# Altium PCB EG8010.PcbDoc
Units mm, origin at the board's own origin, x right, y up, seen from the top; angles counter-clockwise.
Board outline 42.42 x 41.66 mm, 2 copper layers (Top Layer, Bottom Layer); 37 components, 28 nets, 133 pads, 43 vias.
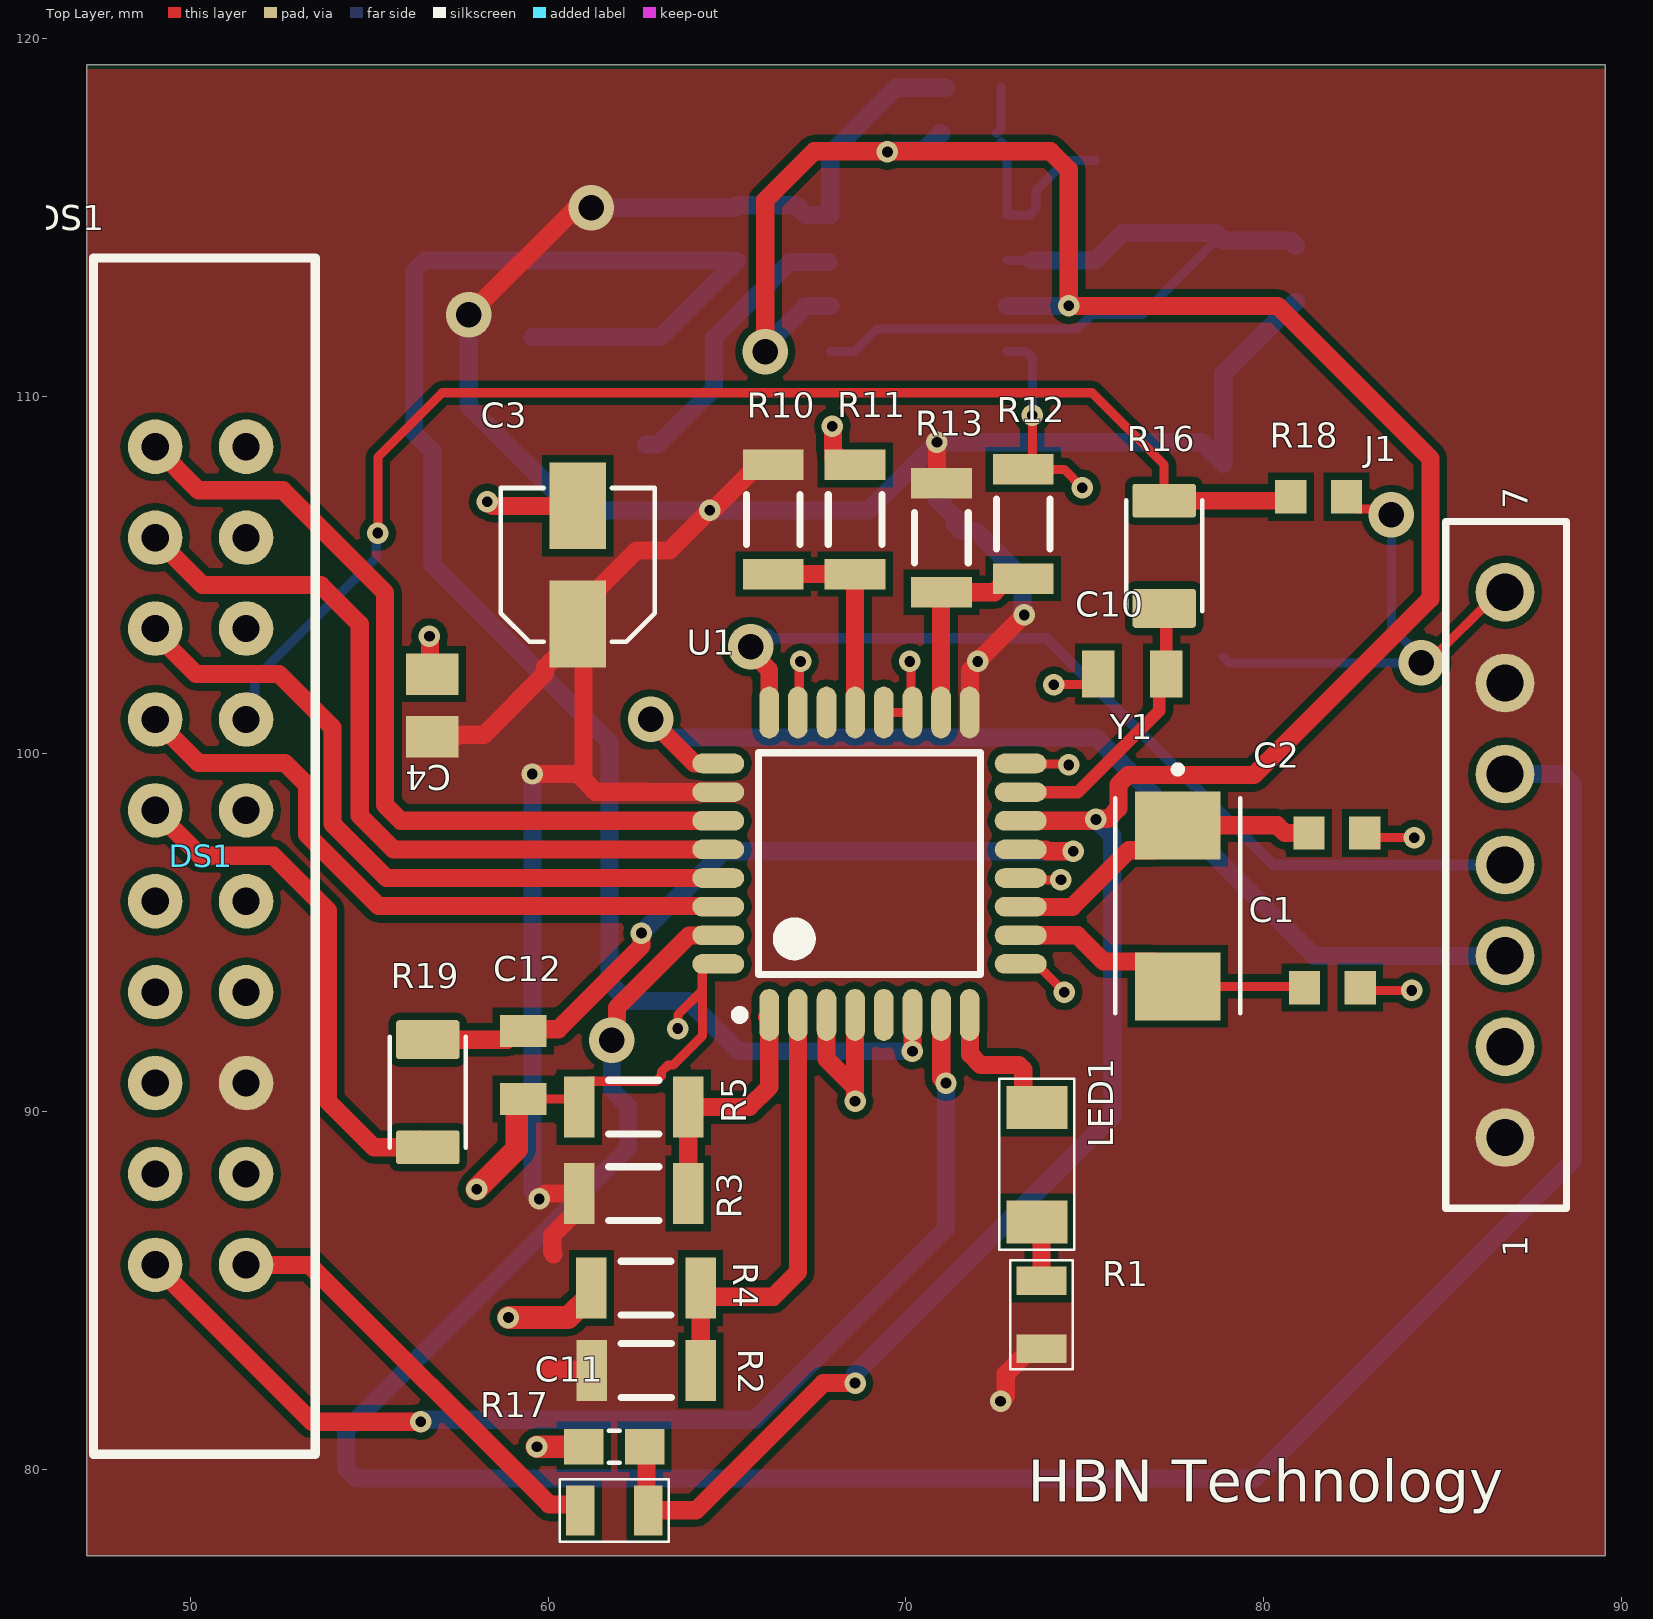
[diagram p0: Top Layer view]
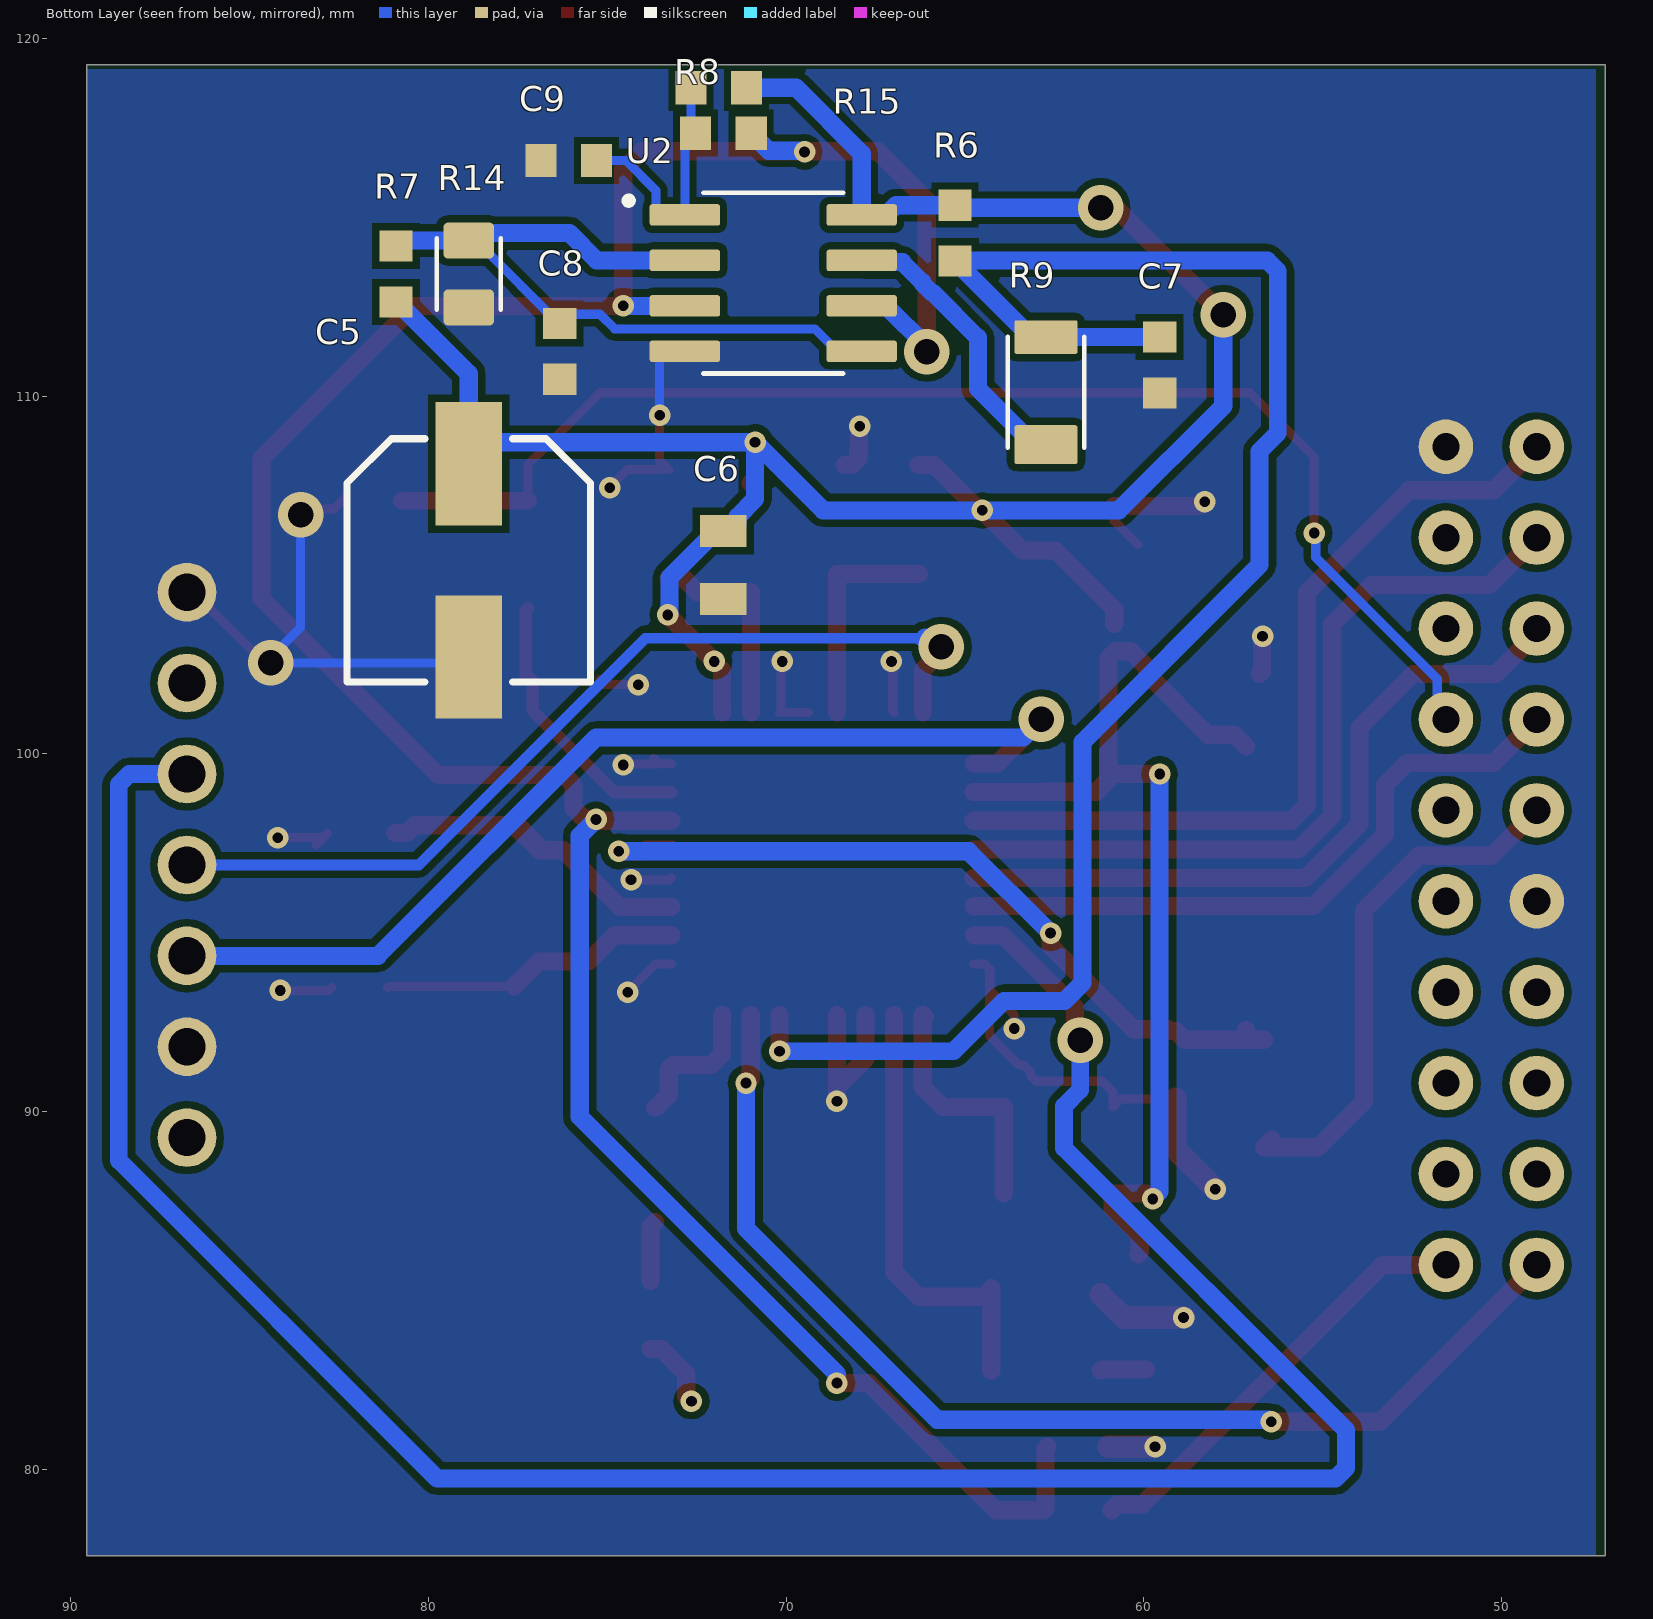
[diagram p1: Bottom Layer view, seen from below]
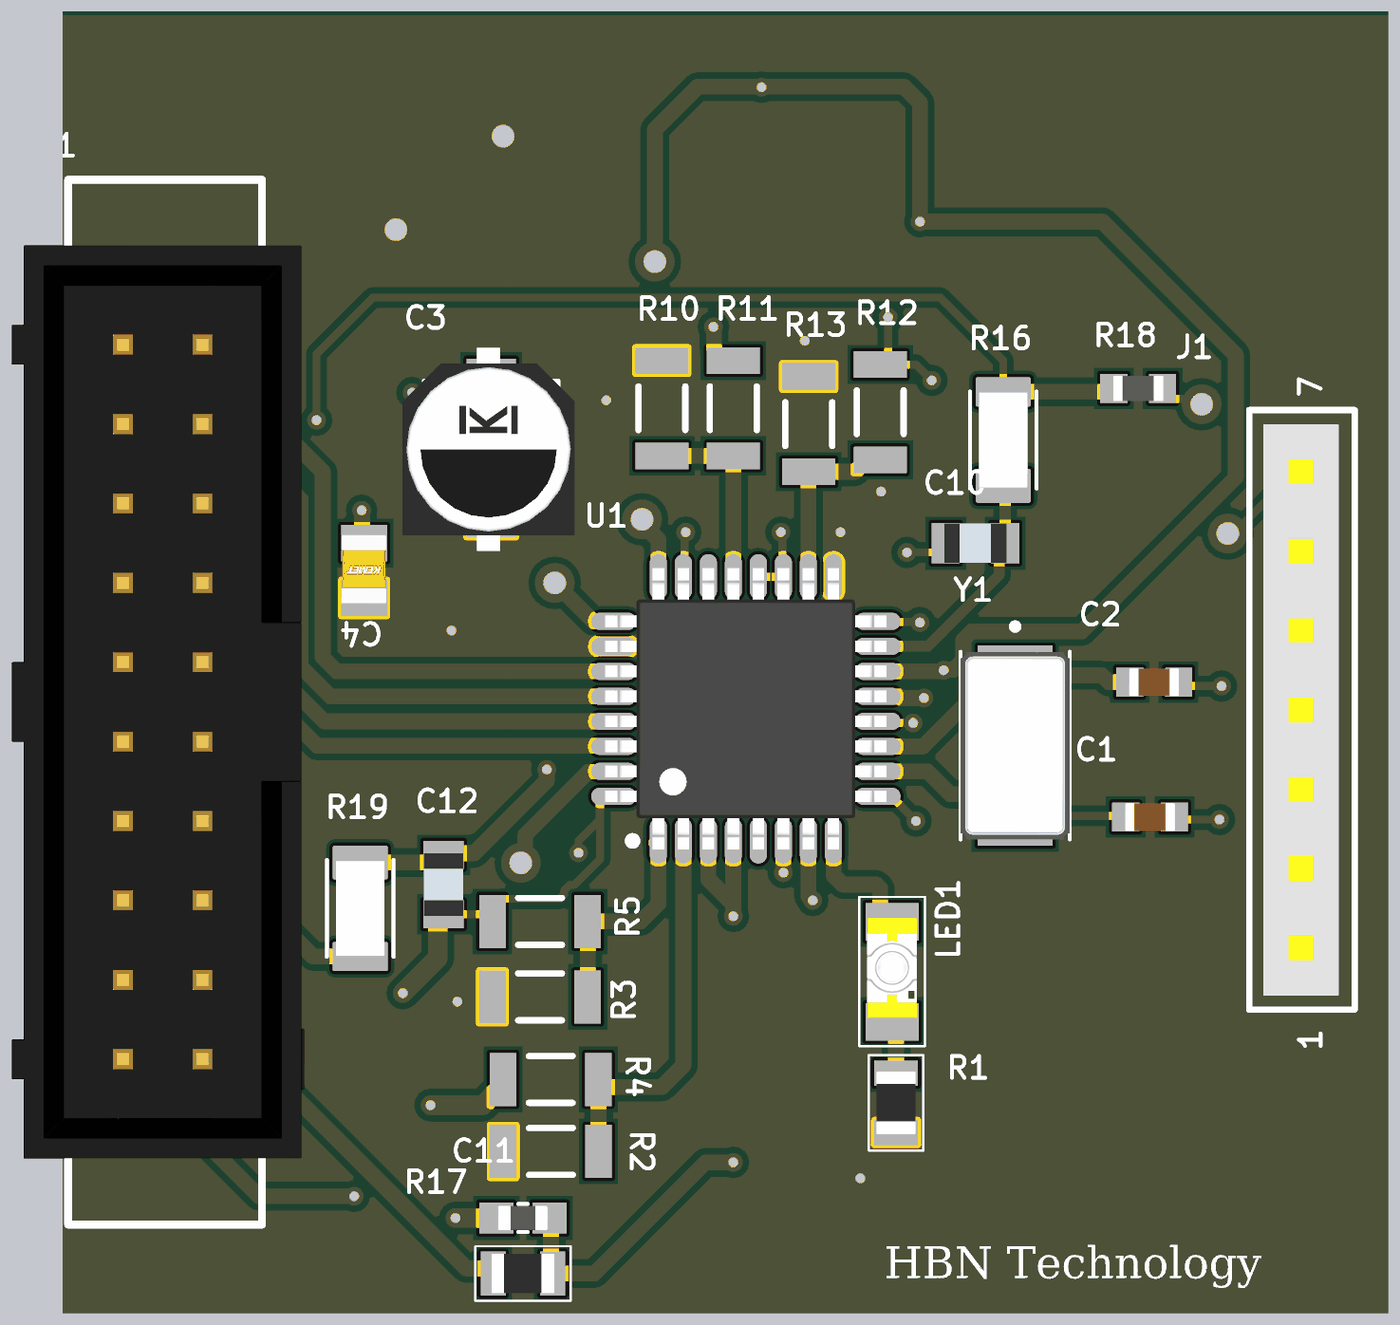
[diagram p2: 3D render of the assembled board from above, using the file's embedded part models]
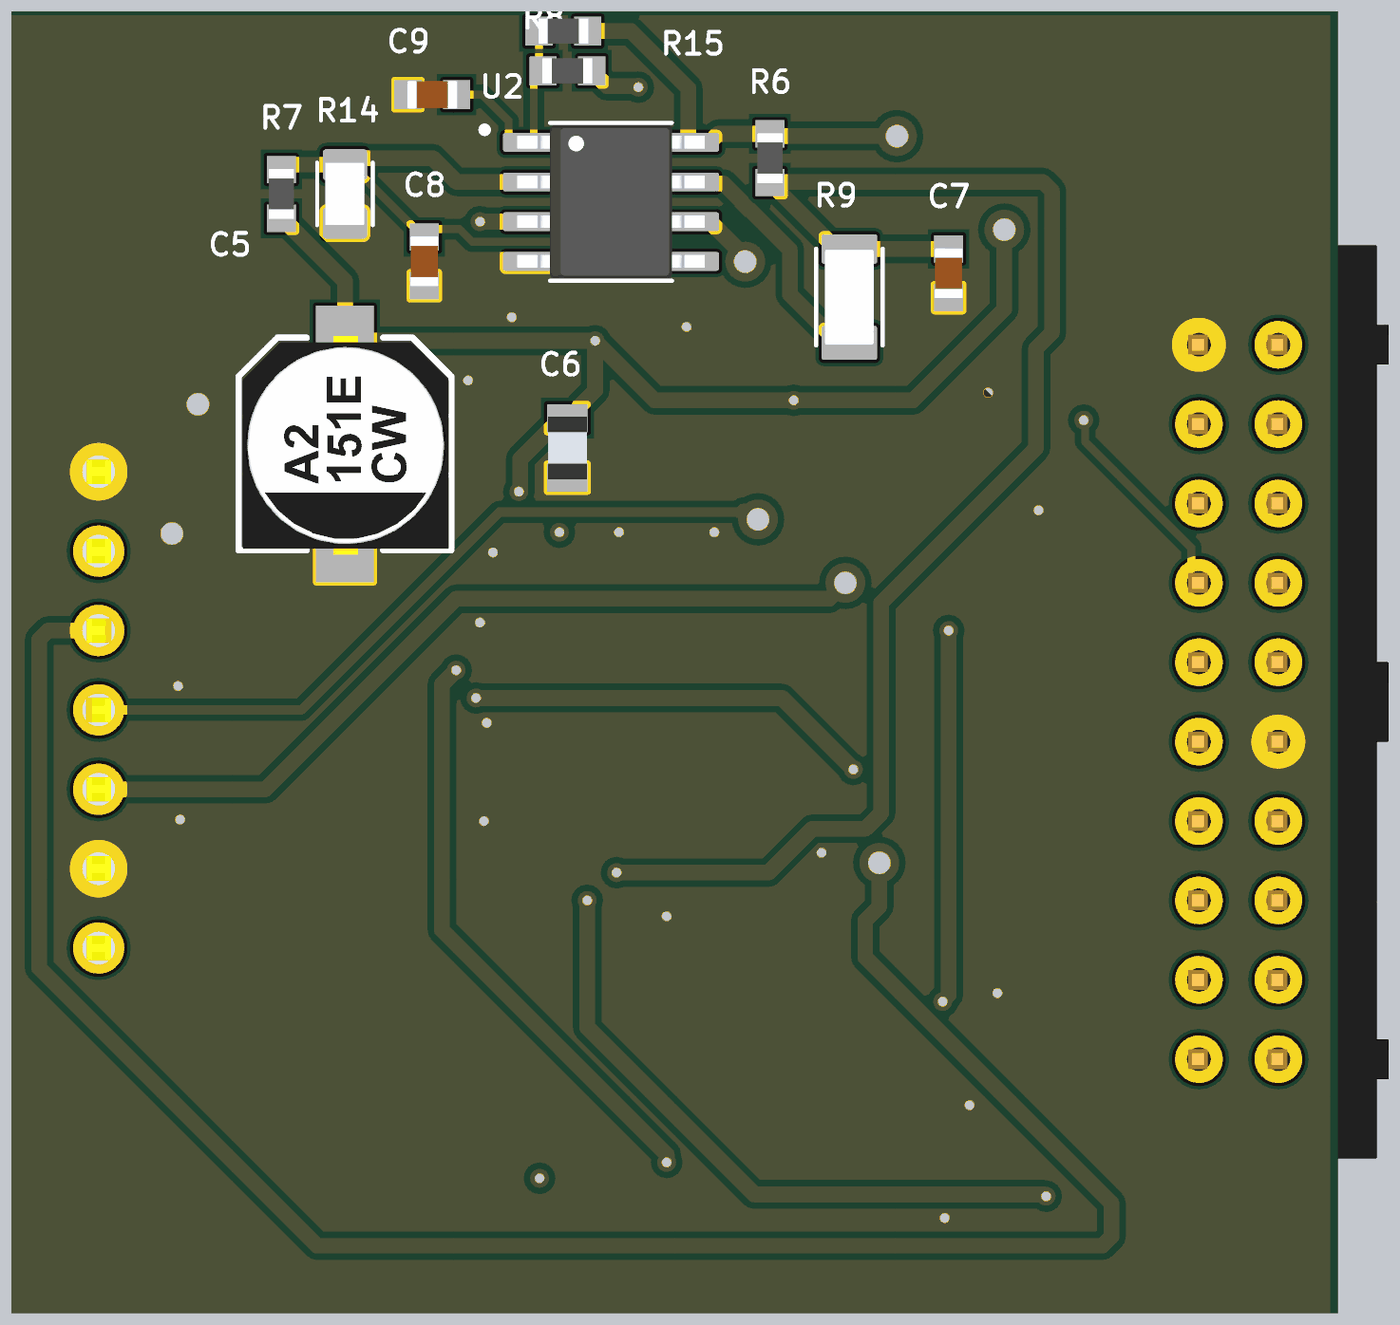
[diagram p3: 3D render of the assembled board from below, using the file's embedded part models]

## Layer stack, top to bottom
Top Solder: solder mask 0.0102, Solder Resist, Dk 3.5
Top Layer: signal copper 0.0356
Dielectric 1: dielectric 0.32, FR-4, Dk 4.8
Bottom Layer: signal copper 0.0356
Bottom Solder: solder mask 0.0102, Solder Resist, Dk 3.5

## Board outline
47.117,77.597 47.117,119.253 89.535,119.253 89.535,77.597

## Design rules (kind name [scope] priority, off if disabled: settings)
Clearance [All] p1: gap=0.2 ignorepadtopadclearanceinfootprint=FALSE except(0: Arc-Hole Track-Hole SMDPad-Hole THPad-Hole Via-Hole Fill-Hole Poly-Hole Region-Hole Text-Hole)
PolygonConnect [All] p1: connectstyle=Direct reliefconductorwidth=0.254 reliefentries=4 polygonreliefangle="90 Angle" airgapwidth=0.254
RoutingVias [All] p1: holewidth=0.711 width=1.27 viastyle="Through Hole" minholewidth=0.711 minwidth=1.27 maxholewidth=0.711 maxwidth=1.27
SolderMaskExpansion [All] p1: expansion=0.102 istentingtop=FALSE
Width [All] p1: maxlimit=2539.975 minlimit=0.254 preferedwidth=0.254 bottomlayer_maxwidth=254 minimp=50.000000 maximp=50.000000 favimp=50.000000
30 further rules are at their usual default settings.

## Components (designator, comment, footprint, x,y, rotation, side; value= is the part's Value field where it differs from the comment)
C1 "22uF" CAPC1608X90N(22uf0603) 81.915,93.472 r180 top
C2 "22uF" CAPC1608X90N(22uf0603) 82.042,97.79 r180 top
C3 "10µF" CAPAE430X550N 60.833,105.282 r90 top
C4 "0.1uF" CAPC2012X88N 56.769,101.36 r90 top
C5 "10uF" CapSmdElc 78.867,105.41 r270 bottom
C6 "100nF 50V" "WCAP-CSGP SMT 0805 100nF 50V" 71.755,105.283 r90 bottom
C7 "10nF" CAPC1608X90N 59.563,110.871 r270 bottom
C8 "10nF" CAPC1608X90N 76.327,111.252 r270 bottom
C9 "10nF" CAPC1608X90N 76.073,116.586 r0 bottom
C10 "100nF 50V" "WCAP-CSGP SMT 0805 100nF 50V" 76.327,102.235 r0 top
C11 "1000PF" CAPC1608X90 61.849,80.645 r180 top
C12 "100nF 50V" "WCAP-CSGP SMT 0805 100nF 50V" 59.309,91.313 r90 top
DS1 "NHD-0208BZ-FL-YBW" idc20 49.022,108.585 r270 top
J1 "7POS CONN" SAMTEC-SSW-107-02-X-S 86.741,96.901 r90 top
LED1 "LTST-C150KGKT" L-1206 73.66,88.519 r270 top
R1 "R-0805" R-0805 73.787,84.328 r270 top
R2 "*" "RES 0.0 OHM 1206" 62.744,82.774 r0 top
R3 "*" "RES 0.0 OHM 1206" 62.396,87.719 r0 top
R4 "*" "RES 0.0 OHM 1206" 62.737,85.077 r0 top
R5 "*" "RES 0.0 OHM 1206" 62.396,90.132 r0 top
R6 "10K" RESC1608X55N 65.278,114.554 r270 bottom
R7 "10K" RESC1608X55N 80.899,113.411 r90 bottom
R8 "100K" RESC1608X55N 71.755,117.348 r180 bottom
R9 "100Ω" RESC3115X65N 62.738,110.109 r90 bottom
R10 "*" "RES 0.0 OHM 1206" 66.294,106.553 r270 top
R11 "*" "RES 0.0 OHM 1206" 68.58,106.553 r270 top
R12 "*" "RES 0.0 OHM 1206" 73.279,106.426 r270 top
R13 "*" "RES 0.0 OHM 1206" 70.993,106.045 r270 top
R14 "1.5K" RESC2012X65N 78.867,113.411 r90 bottom
R15 "10K" RESC1608X55N 71.882,118.618 r0 bottom
R16 "100Ω" RESC3115X65N 77.216,105.537 r90 top
R17 "R-0805" R-0805 61.849,78.867 r0 top
R18 "10K" RESC1608X55N 81.534,107.188 r0 top
R19 "100Ω" RESC3115X65N 56.642,90.551 r270 top
U1 "*" EG8010 68.982,96.935 r90 top
U2 "*" SOIC127P599X175-8N 70.358,113.157 r180 bottom
Y1 "12MHz" XTAL_ECS-143-20-23A-EN-TR 77.597,95.758 r270 top

## Footprints (in the part's own frame and the unit in brackets; to place one, negate y for a bottom-side part, rotate by r counter-clockwise, add the part's x,y. Pads: shape width x height; smd on the part's side, far side on the other; paste and mask are expansions set on the pad)
CAPAE430X550N [mm]
  rect 2.42x1.58 smd: 1(-1.65,0) 2(1.65,0)
  silkscreen extent -2.15,-2.15 2.15,2.15, body extent -3.29,-2.67 3.21,2.83, height 5.63
CAPC1608X90 [mm]
  rect 1.1x1 smd: 1(-0.85,0) 2(0.85,0)
  silkscreen extent -0.15,-0.45 0.15,0.45, body extent -0.8,-0.4 0.8,0.4, height 0.9
CAPC1608X90N [mm]
  rect 0.87x0.93 smd: 1(-0.78,0) 2(0.78,0)
  body extent -0.8,-0.45 0.8,0.45, height 0.78
CAPC1608X90N(22uf0603) [mm]
  rect 0.87x0.93 smd: 1(-0.78,0) 2(0.78,0)
  body extent -0.8,-0.45 0.8,0.45, height 0.78
CAPC2012X88N [mm]
  rect 1.16x1.47 smd: 1(-0.875,0) 2(0.875,0)
  body extent -1.06,-0.72 1.14,0.73, height 1
CapSmdElc [mm] "Aluminum Electrolytic Capacitor, Body 6.70x6.70x6.30mm, IPC Low Density"
  rect 3.45x1.85 smd: 1(-2.7,0) 2(2.7,0)
  silkscreen extent -3.4,-3.4 3.4,3.4, body extent -3.45,-3.28 3.55,3.32, height 6.92
EG8010 [mm]
  oval 1.45x0.55 smd: 1(-4.225,2.8) 2(-4.225,2) 3(-4.225,1.2) 4(-4.225,0.4) 5(-4.225,-0.4) 6(-4.225,-1.2) 7(-4.225,-2) 8(-4.225,-2.8) 17(4.225,-2.8) 18(4.225,-2) 19(4.225,-1.2) 20(4.225,-0.4) 21(4.225,0.4) 22(4.225,1.2) 23(4.225,2) 24(4.225,2.8)
  oval 0.55x1.45 smd: 9(-2.8,-4.225) 10(-2,-4.225) 11(-1.2,-4.225) 12(-0.4,-4.225) 13(0.4,-4.225) 14(1.2,-4.225) 15(2,-4.225) 16(2.8,-4.225) 25(2.8,4.225) 26(2,4.225) 27(1.2,4.225) 28(0.4,4.225) 29(-0.4,4.225) 30(-1.2,4.225) 31(-2,4.225) 32(-2.8,4.225)
  silkscreen extent -4.35,-3.1 3.1,3.75, body extent -4.5,-4.5 4.5,4.5, height 1.6
idc20 [mil]
  round 60 hole 30: 1(0,0) 2(100,0) 3(200,0) 4(300,0) 5(400,0) 6(500,0) 7(600,0) 8(700,0) 9(800,0) 10(900,0) 11(0,100) 12(100,100) 13(200,100) 14(300,100) 15(400,100) 16(500,100) 17(600,100) 18(700,100) 19(800,100) 20(900,100)
  silkscreen extent -208,-68 1108,176, body extent -125,-139 1025,230, height 350
L-1206 [mm]
  rect 1.2x1.7 smd: 1(-1.6,0) 2(1.6,0)
  silkscreen extent -2.4,-1.05 2.37,1.05, body extent -1.73,-0.8 1.48,0.8, height 1.11
R-0805 [mm]
  rect 0.8x1.4 smd: 1(-0.95,0) 2(0.95,0)
  silkscreen extent -1.53,-0.87 1.53,0.87, body extent -1,-0.62 1,0.62, height 0.56
"RES 0.0 OHM 1206" [mm]
  rect 0.85x1.7 smd: 1(-1.525,0) 2(1.525,0)
  silkscreen extent -0.7,-0.75 0.7,0.75, body extent -1.6,-0.85 1.6,0.85, height 0.65
RESC1608X55N [mm]
  rect 0.87x0.93 smd: 1(-0.78,0) 2(0.78,0)
  body extent -0.8,-0.4 0.8,0.4, height 0.55
RESC2012X65N [mm]
  rrect25% 1x1.42 smd: 1(-0.935,0) 2(0.935,0)
  silkscreen extent -1,-0.89 1,0.89, body extent -1,-0.62 1,0.63, height 0.53
RESC3115X65N [mm]
  rrect14% 1.09x1.77 smd: 1(-1.465,0)
  rrect14% 0.94x1.77 smd: 2(1.54,0)
  silkscreen extent -1.55,-1.06 1.55,1.06, body extent -1.52,-0.77 1.53,0.78, height 0.53
SAMTEC-SSW-107-02-X-S [mm]
  round 1.64 hole 1.04: 1(-7.62,0) 2(-5.08,0) 3(-2.54,0) 4(0,0) 5(2.54,0) 6(5.08,0) 7(7.62,0)
  silkscreen extent -9.59,-1.72 9.59,1.66, body extent -9.14,-1.21 9.14,1.21, height 8.51
SOIC127P599X175-8N [mm]
  rrect25% 1.97x0.6 smd: 1(-2.47,1.905) 2(-2.47,0.635) 3(-2.47,-0.635) 4(-2.47,-1.905) 5(2.47,-1.905) 6(2.47,-0.635) 7(2.47,0.635) 8(2.47,1.905)
  silkscreen extent -4.14,-2.52 1.95,2.52, body extent -3,-2.45 3,2.45, height 1.75
"WCAP-CSGP SMT 0805 100nF 50V" [mm]
  rect 0.9x1.3 smd: 1(-0.95,0) 2(0.95,0)
  body extent -1,-0.62 1,0.63, height 0.78
XTAL_ECS-143-20-23A-EN-TR [mm]
  rect 1.9x2.4 smd: 1(-2.25,0) 2(2.25,0)
  silkscreen extent -3.91,-1.75 3,1.75, body extent -3,-1.75 3,1.75, height 1.1

## Part data
C1 C2: library part "CAP 22uF 0603", "22ÂµF Â±20% 6.3V Ceramic Capacitor X5R 0603 (1608 Metric)", Package="0603 Samsung", Arrow_Americas-Purchase-URL=https://snapeda.com/shop?store=Arrow+Americas&id=3597960, Digi-Key_Part_Number=1276-1193-1-ND, DigiKey-Purchase-URL=https://snapeda.com/shop?store=DigiKey&id=3597960, MF="Samsung Electro-Mechanics", MP=CL10A226MQ8NRNC, SnapEDA_Link=https://www.snapeda.com/parts/CL10A226MQ8NRNC/Samsung%20Electro-Mechanics/view-part/3597960/?ref=snap
C3: library part "10µF 16V Electrolytic Cap", "10ÂµF 16V Aluminum Electrolytic Capacitors Radial, Can - SMD 2000 Hrs @ 85Â°C", Package="Radial Panasonic", Digi-Key_Part_Number=PCE3878CT-ND, Digi-Key_Purchase_URL=https://www.digikey.com/product-detail/en/panasonic-electronic-components/EEE-1CA100SR/PCE3878CT-ND/766254?utm_source=snapeda&utm_medium=aggregator&utm_campaign=symbol, MF=Panasonic, MP=EEE-1CA100SR, SnapEDA_Link=https://www.snapeda.com/parts/EEE-1CA100SR/Panasonic%20Electronic%20Components/view-part/1408599/?ref=snap
C4: library part "CAP 0.1uF SMD 0805", "Cap Ceramic 0.1uF 35V X7R 10% SMD 0805 125Â°C Paper T/R", Package="0805 KEMET", Availability=Unavailable, MF=KEMET, MP=C0805C104K6RACTU, Price=None, SnapEDA_Link=https://www.snapeda.com/parts/C0805C104K6RACTU/KEMET/view-part/2037626/?ref=snap
C5: library part C-10uf
C6 C10 C12: library part "CAP 100nF 50V SMT 0805", "WCAP-CSGP General Purpose MLCC; SMT 0805; X7R; 100nF 10%; 50V; -55C to +125C; Tech. PN X7R0805104K050DFCT10000", Package="0805 Wurth Electronics", Availability=Warning, BuyPart=https://www.snapeda.com/parts/885012207098/Wurth%20Electronics%20Inc/view-part/4217223/?ref=eda, DigiKey-Purchase-URL=https://snapeda.com/shop?store=DigiKey&id=4217223, MF="Wurth Electronics Inc", Mouser-Purchase-URL=https://snapeda.com/shop?store=Mouser&id=4217223, MP=885012207098, Price=None, SnapEDA_Link=https://www.snapeda.com/parts/885012207098/Wurth%20Electronics%20Inc/view-part/4217223/?ref=snap
C7 C8 C9: library part "CAP 10nF 50V", "10000pF Â±10% 50V Ceramic Capacitor X7R 0603 (1608 Metric)", Package="0603 Samsung", Availability=Unavailable, BuyPart=https://www.snapeda.com/parts/CL10B103KB8NNNC/Samsung%20Electro-Mechanics/view-part/3597959/?ref=eda, MF="Samsung Electro-Mechanics", MP=CL10B103KB8NNNC, Price=None, SnapEDA_Link=https://www.snapeda.com/parts/CL10B103KB8NNNC/Samsung%20Electro-Mechanics/view-part/3597959/?ref=snap
C11: library part "CAP 0603 1000PF", "SURFACE-MOUNT CERAMIC MULTILAYER CAPACITORS", Package=None, Availability=Unavailable, MP=CC0603KRX7RYBB102, Price=None
DS1: "Display", Manufacturer_Name="Newhaven Display", Mouser Part Number=763-0208BZ-FL-YBW, Allied Price/Stock=https://www.alliedelec.com/newhavendisplayinternational-nhd-0208bz-fl-ybw/70518052/, Allied_Number=70518052, Datasheet Link=https://www.newhavendisplay.com/specs/NHD-0208BZ-FL-YBW.pdf, Height=13.5mm, Manufacturer_Part_Number=NHD-0208BZ-FL-YBW, Mouser Price/Stock=https://www.mouser.com/Search/Refine.aspx?Keyword=763-0208BZ-FL-YBW
LED1: "LED", Manufacturer_Name=Lite-On, Mouser Part Number=859-LTST-C150KGKT, RS Part Number=6920871, Datasheet Link=http://optoelectronics.liteon.com/upload/download/ds22-2000-072/ltst-c150kgkt.pdf, Height=1.2mm, Manufacturer_Part_Number=LTST-C150KGKT, Mouser Price/Stock=https://www.mouser.com/Search/Refine.aspx?Keyword=859-LTST-C150KGKT, RS Price/Stock=https://uk.rs-online.com/web/p/products/6920871
R2 R3 R4 R5 R10 R11 R12 R13: library part "RES 0.0 Ω 1206"
R6 R7 R15 R18: library part "RES 10Kohm 0603", "10 kOhms Â±1% 0.25W, 1/4W Chip Resistor 0603 (1608 Metric) Automotive AEC-Q200, Pulse Withstanding Thick Film", Package="1608 Rohm Semiconductor", Availability=Unavailable, DigiKey-Purchase-URL=https://snapeda.com/shop?store=DigiKey&id=975090, MF=Rohm, Mouser-Purchase-URL=https://snapeda.com/shop?store=Mouser&id=975090, MP=ESR03EZPF1002, Price=None, SnapEDA_Link=https://www.snapeda.com/parts/ESR03EZPF1002/Rohm/view-part/975090/?ref=snap
R8: library part "RES 100KOHM 0603", "100 kOhms ±0.25% 0.1W, 1/10W Chip Resistor 0603 (1608 Metric) Anti-Sulfur, Automotive AEC-Q200, Moisture Resistant Thin Film", Package=None, Availability=Unavailable, MP=AT0603CRD07100KL, Price=None
R9 R16 R19: library part "RES 100OHM", "RP 2B 100R 0.1% 15PPM CUT LENG", Package=None, Availability=Unavailable, MP=8-1879255-5, Price=None
R14: library part "RES 1.5K 0805", "RN 0805 1K5 0.1% 10PPM CUT LENGTH", Package=None, Availability=Unavailable, MP=1676237-1, Price=None
U1: library part EG8010, "EG8010 is a CMOS IC that integrates SPWM sinusoid generator, dead / time control circuit, range divider，soft start circuit, circuit protection, RS232 serial communication, / 12832 serial LCD unit, and etc."
U2: library part LM393D, "Dual differential comparator, commercial grade 8-SOIC 0 to 70", Package="SOIC-8 Texas Instruments", Arrow_Electronics-Purchase-URL=https://snapeda.com/shop?store=Arrow+Electronics&id=4806035, Availability=Good, BuyPart=https://www.snapeda.com/parts/LM393D/Texas%20Instruments/view-part/4806035/?ref=eda, MF="Texas Instruments", Mouser-Purchase-URL=https://snapeda.com/shop?store=Mouser&id=4806035, MP=LM393D, Price=None, SnapEDA_Link=https://www.snapeda.com/parts/LM393D/Texas%20Instruments/view-part/4806035/?ref=snap, Texas_Instruments-Purchase-URL=https://snapeda.com/shop?store=Texas+Instruments&id=4806035
Y1: library part ECS-120-20-23A-TR, "Crystals 12MHz 20pF 50ppm -10C +70C", Package="SMD-2 ECS International", Availability=Warning, Check_prices=https://www.snapeda.com/parts/ECS-120-20-23A-TR/ECS%20International/view-part/511443/?ref=eda, MF="ECS International", MP=ECS-120-20-23A-TR, Price=None, Purchase-URL=https://pricing.snapeda.com/search/part/ECS-120-20-23A-TR/?ref=eda, SnapEDA_Link=https://www.snapeda.com/parts/ECS-120-20-23A-TR/ECS%20International/view-part/511443/?ref=snap

## Via types
v1: diameter 0.6, hole 0.3, Top Layer to Bottom Layer, tented both sides, 35 vias
v2: diameter 1.27, hole 0.711, Top Layer to Bottom Layer, tented both sides, 8 vias

## Nets (pads, with @x,y where several pads share a name; then routed paths per layer and width w, separated by ;. In a path a pad name is that pad's centre, name@x,y a point inside that pad or via, vN(x,y) a via of type N, cw(c..) or ccw(c..) an arc to the next point about the centre after c; other vN are vias at no path point)
ISO5v: C3.1 C4.1 C5.1 C6.2 DS1.18 J1.1 J1.6 R1.2 R2.1 R3.1 R6.1 R7.1 R10.1 R13.1 R15.1 U1.17 U1.26 U2.8 | length 98.7
  Top Layer w0.508: C4.1@57.15,100.217 57.469,100.536 58.207,100.536 59.916,102.245 59.916,102.423 60.363,102.87 60.794,102.87 60.988,102.676 60.988,99.286 ; v2(57.785,112.268) 60.706,115.189 61.145,115.189 v2(61.214,115.258) ; v1(59.563,99.441) 60.833,99.441 60.988,99.286 ; v1(59.752,87.568) 59.777,87.568 59.929,87.719 R3.1 60.871,87.294 60.117,86.541 60.117,86.085 60.157,86.045 60.157,86.02 ; 59.944,82.804 61.189,82.804 R2.1 ; C3.1 60.833,104.052 62.47,105.689 63.398,105.689 v1(64.516,106.807) 64.534,106.825 64.616,106.825 65.869,108.078 R10.1 ; U1.26 62.736,98.935 62.728,98.943 61.331,98.943 61.119,99.155 60.988,99.286 ; v1(70.866,108.712) 70.866,107.697 R13.1 ; U1.17 71.79,101.168 71.79,102.342 ; v1(72.009,102.586) 72.009,102.601 73.279,103.871 73.291,103.871 v1(73.306,103.886) ; v1(72.644,81.915) 72.79,82.061 72.79,82.681 73.487,83.378 R1.2
  Bottom Layer w0.508: v2(57.785,112.268) 57.785,109.728 60.706,106.807 v1(64.516,106.807) 68.961,106.807 v1(70.866,108.712) ; v1(59.563,99.441) 59.563,87.782 59.752,87.593 v1(59.752,87.568) ; v2(61.214,115.258) 61.218,115.261 65.205,115.261 R6.1 66.931,115.334 67.203,115.062 U2.8 67.888,116.783 69.723,118.618 R15.1 ; v1(73.306,103.886) 73.261,103.931 73.261,104.927 71.955,106.233 C6.2 71.555,106.233 71.359,106.429 71.359,106.629 70.866,107.122 v1(70.866,108.712) ; R7.1 80.869,112.631 78.867,110.629 C5.1 78.265,108.712 v1(70.866,108.712)
ISO5vGnd: C1.1 C2.1 C3.2 C4.2 C5.2 C6.1 C7.2 C8.2 C9.2 C10.1 C11.2 C12.1 DS1.6 DS1.11 J1.2 J1.7 R4.1 R5.1 R11.1 R12.1 R14.1 R18.2 U1.3 U1.4 U1.9 U1.12 U1.16 U1.19 U1.20 U1.23 U1.32 U2.4 | length 63.3
  Top Layer w0.254: C12.1@59.109,90.363 C12.1 60.64,90.363 R5.1 60.871,90.557 61.169,90.855 63.02,90.855 63.169,91.004 63.169,91.118 63.36,91.309 63.496,91.309 64.322,92.135 64.322,93.998 64.458,94.135 U1.32 ; C3.2@60.17,105.849 60.833,106.512 C3.2 ; 60.559,84.424 60.914,84.424 61.212,84.722 R4.1@61.212,84.9 ; v1(63.627,92.329) 63.627,92.71 64.302,93.385 U1.32@64.302,93.998 ; U1.23 67.019,101.197 67.019,102.549 v1(67.056,102.586) ; U1.20 U1.19 70.143,101.199 70.143,102.547 v1(70.104,102.586) ; U1.9 73.644,94.135 74.422,93.357 v1(74.422,93.345) ; U1.12 73.258,96.483 v1(74.332,96.483) ; U1.16 73.561,99.735 U1.16@73.698,99.871 ; v1(73.533,109.466) 73.533,108.205 R12.1 74.421,107.951 v1(74.93,107.442) ; U1.16@73.561,99.715 74.529,99.715 v1(74.549,99.695) ; v1(74.134,101.938) 75.08,101.938 C10.1@75.215,102.073 ; R18.2 82.314,107.158 82.622,106.85 83.396,106.85 v2(83.566,106.68) ; C1.1 82.775,93.392 v1(84.135,93.392) ; C2.1@83.13,97.452 82.822,97.76 C2.1 82.949,97.663 v1(84.201,97.663) ; v2(84.4,102.544) 84.582,102.544 86.559,104.521 J1.7
  Top Layer w0.508: v1(56.688,103.288) 56.705,103.27 56.705,102.299 C4.2 ; v1(58.301,107.051) 58.326,107.051 58.445,106.932 C3.2 ; U1.3 67.782,91.484 68.58,90.685 v1(68.58,90.297) U1.4@68.58,92.708 ; v1(67.942,109.157) 67.96,109.14 67.96,108.486 67.984,108.462 67.984,108.249 68.155,108.078 R11.1@68.368,108.078
  Top Layer w0.635: v1(58.005,87.841) 59.125,88.96 59.125,90.347 C12.1@59.109,90.363 ; v1(58.894,84.254) 60.566,84.254 R4.1@61.212,84.9 ; v1(59.69,80.645) C11.2
  Bottom Layer w0.254: v1(67.056,102.586) v1@67.086,102.616 ; U2.4 73.36,111.252 73.533,111.079 v1(73.533,109.466) ; C5.2 79.033,102.544 v2(84.4,102.544) 84.4,102.703 83.566,103.537 v2(83.566,106.68)
NetC1_2: C1.2 U1.10 Y1.2 | length 8.5
  Top Layer w0.254: Y1.2 81.099,93.508 C1.2
  Top Layer w0.508: U1.10 74.794,94.935 75.525,94.204 76.901,94.204 Y1.2
NetC2_2: C2.2 U1.11 Y1.1 | length 9.8
  Top Layer w0.3: Y1.1@76.791,97.453 77.347,98.008 Y1.1
  Top Layer w0.508: U1.11 73.212,95.729 74.647,95.729 76.23,97.312 76.901,97.312 Y1.1 80.374,98.008 80.592,97.79 C2.2@80.927,97.79
NetC7_1: C7.1 R6.2 R9.2 U1.6 | length 48
  Top Layer w0.5: v1(70.182,91.694) U1.6
  Bottom Layer w0.5: C7.1 C7.1 62.737,111.65 R9.2 63.153,111.649 R6.2@65.179,113.676 ; R6.2 65.081,113.774 65.063,113.792 56.554,113.792 56.261,113.499 56.261,108.966 56.769,108.458 56.769,105.283 61.722,100.33 61.722,93.599 62.22,93.101 63.916,93.101 65.323,91.694 v1(70.182,91.694)
NetC8_1: C8.1 R7.2 R14.2 U2.2 U2.5 | length 20.8
  Bottom Layer w0.254: U2.5 68.573,111.252 69.2,111.879 74.793,111.879 75.2,112.286 76.581,112.286 76.611,112.286 78.284,113.959 78.284,113.973 78.657,114.346 R14.2 ; U2.2 U2.2@73.513,113.792
  Bottom Layer w0.5: U2.2@73.513,113.792 75.293,113.792 76.055,114.554 78.659,114.554 R14.2 80.744,114.346 R7.2
NetC9_1: C9.1 R8.1 R15.2 U2.1 | length 6.8
  Bottom Layer w0.254: R8.1 72.662,117.475 R15.2 ; R8.1@72.662,117.094 72.828,116.928 U2.1 73.461,115.062 73.634,115.235 73.634,115.743 74.477,116.586 C9.1
NetC10_2: C10.2 R16.1 U1.15 | length 7.8
  Top Layer w0.35: U1.15 74.805,98.935 77.081,101.211 77.081,102.039 C10.2 77.277,104.011 R16.1
NetC11_1: C11.1 R8.2 R17.2 U1.14 U2.3 U2.6 | length 81.4
  Top Layer w0.508: C11.1 62.749,80.595 62.749,78.917 R17.2 64.135,78.867 67.691,82.423 v1(68.58,82.423) ; v2(66.068,111.244) 66.068,115.471 67.437,116.84 v1@69.485,116.84 ; v1(69.485,116.824) v1@69.485,116.84 ; U1.14 75.275,98.135 v1(75.311,98.171) 75.328,98.188 75.645,98.188 75.943,98.486 75.943,99.146 76.209,99.412 79.727,99.412 84.655,104.34 84.655,108.258 80.391,112.522 v1(74.549,112.522) 74.549,116.332 74.041,116.84 v1@69.485,116.84
  Bottom Layer w0.508: v2(66.068,111.244) 66.068,111.387 67.203,112.522 U2.6 ; v1(68.58,82.423) 68.58,82.677 75.765,89.862 75.765,97.717 v1(75.311,98.171) ; v1(69.485,116.824) 69.519,116.858 70.485,116.858 70.764,117.137 70.794,117.137 70.975,117.318 R8.2 ; U2.3 v1(74.549,112.522)
NetC12_2: C12.2 R19.1 U1.13 | length 21.9
  Top Layer w0.508: R19.1 58.862,92.016 59.109,92.263 C12.2 ; R19.1@57.15,92.286 R19.1@57.161,92.275 ; C12.2@59.297,92.275 59.334,92.311 60.291,92.311 62.611,94.631 v1(62.611,94.996) ; U1.13 73.215,97.327 73.896,97.327 73.94,97.282 v1(74.676,97.282)
  Bottom Layer w0.508: v1(62.611,94.996) 64.897,97.282 v1(74.676,97.282)
NetDS1_1: DS1.1 U1.27 | length 23.5
  Top Layer w0.508: DS1.1 50.238,107.369 52.593,107.369 55.445,104.517 55.445,98.577 55.887,98.135 U1.27
NetDS1_2: DS1.2 U1.28 | length 22.5
  Top Layer w0.508: DS1.2 50.346,104.721 53.648,104.721 54.737,103.632 54.737,98.283 55.685,97.335 U1.28
NetDS1_3: DS1.3 U1.29 | length 20.3
  Top Layer w0.508: DS1.3 49.022,103.378 50.165,102.235 52.479,102.235 53.975,100.739 53.975,98.044 55.484,96.535 U1.29
NetDS1_4: DS1.4 U1.30 | length 18.7
  Top Layer w0.508: DS1.4 50.238,99.749 52.651,99.749 53.267,99.133 53.267,97.751 55.268,95.75 64.741,95.75 U1.30
NetDS1_5: DS1.5 R19.2 | length 14.9
  Top Layer w0.508: DS1.5 50.292,97.155 52.324,97.155 53.848,95.631 53.848,90.297 55.134,89.011 R19.2 R19.2@56.426,89.227
NetDS1_10: DS1.10 U1.7 | length 32.2
  Top Layer w0.508: DS1.10 53.408,81.339 v1(56.447,81.339) ; U1.7 70.987,92.704 70.987,90.938 v1(71.12,90.805)
  Bottom Layer w0.508: v1(56.447,81.339) 56.507,81.399 65.778,81.399 71.12,86.741 v1(71.12,90.805)
NetDS1_14: DS1.14 R16.2 R18.1 | length 37
  Top Layer w0.254: v1(55.245,106.172) 55.245,108.294 57.044,110.093 57.277,110.093 75.2,110.093 77.216,108.077 R16.2 ; R18.1@80.738,107.204 R18.1
  Top Layer w0.5: R16.2 R18.1@80.738,107.077
  Bottom Layer w0.254: DS1.14 51.805,101.208 51.805,102.095 55.201,105.491 55.201,106.128 v1(55.245,106.172)
NetDS1_20: DS1.20 R17.1 | length 12.2
  Top Layer w0.508: DS1.20 53.34,85.725 60.035,79.03 60.753,79.03 60.899,78.884 R17.1
NetJ1_3: J1.3 U1.25 | length 29
  Top Layer w0.5: v2(62.865,100.965) 64.095,99.735 U1.25
  Bottom Layer w0.5: v2(62.865,100.965) 63.373,100.457 75.311,100.457 81.407,94.361 J1.3
NetJ1_4: J1.4 U1.24 | length 26.1
  Top Layer w0.5: v2(65.659,102.997) 65.659,102.871 66.182,102.348 U1.24
  Bottom Layer w0.3: v2@65.898,103.236 65.951,103.183 66.266,103.183 66.32,103.236 73.929,103.236 80.264,96.901 J1.4
  Bottom Layer w0.5: v2(65.659,102.997) 65.867,102.997 v2@66.121,103.251
NetJ1_5: J1.5 U1.31 | length 70.7
  Top Layer w0.5: v2(61.78,92.006) 61.925,92.151 61.925,92.913 63.937,94.925 64.747,94.925 U1.31
  Bottom Layer w0.5: v2(61.78,92.006) 61.78,90.616 62.23,90.166 62.23,88.985 54.356,81.111 54.356,80.049 54.649,79.756 79.756,79.756 88.646,88.646 88.646,99.148 88.353,99.441 J1.5
NetLED1_1: LED1.1 U1.8 | length 4
  Top Layer w0.508: U1.8 71.79,92.702 71.79,91.611 72.087,91.313 73.152,91.313 73.279,91.186 73.279,90.465 73.625,90.119 LED1.1
NetLED1_2: LED1.2 R1.1 | length 1.7
  Top Layer w0.508: LED1.2 73.787,86.792 R1.1
NetR2_2: R2.2 R4.2 U1.2 | length 12.6
  Top Layer w0.508: R4.2 64.265,85.074 R4.2@64.265,85.003 ; R2.2 64.265,82.777 R4.2@64.265,85.003 ; U1.2 66.982,85.524 66.294,84.836 64.433,84.836 R4.2@64.265,85.003
NetR3_2: R3.2 R5.2 U1.1 | length 7
  Top Layer w0.508: R3.2 R5.2 65.621,90.132 66.182,90.693 U1.1 U1.1@66.121,92.649
NetR9_1: R9.1 U2.7 | length 8.1
  Bottom Layer w0.5: R9.1 63.078,108.644 64.643,110.209 64.643,111.633 65.899,112.889 65.929,112.889 66.193,113.153 66.193,113.183 66.752,113.742 U2.7@67.838,113.742
NetR10_2: R10.2 R11.2 U1.21 | length 6.2
  Top Layer w0.508: R10.2 R11.2 68.582,105.026 U1.21
NetR12_2: R12.2 R13.2 U1.18 | length 5.8
  Top Layer w0.508: U1.18 70.982,104.393 70.982,104.52 72.473,104.52 72.854,104.901 R12.2
pads on no net: DS1.7 DS1.8 DS1.9 DS1.12 DS1.13 DS1.15 DS1.16 DS1.17 DS1.19 U1.5 U1.22

## Polygon pours and split planes (outlines as drawn)
ISO5vGnd on Bottom Layer "ISO5VGND_L02_P015" (solid, remove dead copper, pour order 15): 89.535,119.126 47.371,119.126 47.371,77.597 89.535,77.597 89.535,99.949
no net on Bottom Layer "NONET_L02_P014" (solid, pour order 14): 92.964,119.634
no net on Bottom Layer "NONET_L02_P010" (solid, pour order 10): 92.456,119.634
no net on Bottom Layer "NONET_L02_P006" (solid, pour order 6): 87.884,115.189
no net on Bottom Layer "NONET_L02_P002" (solid, pour order 2): 92.964,119.634
ISO5v on Top Layer "ISO5V_L01_P017" (solid, remove dead copper, pour order 17): 47.117,119.126 89.535,119.126 89.535,77.597 47.117,77.597

## Silkscreen, mask and mechanical layers (free items; w line width, h text height)
Top Overlay:
  text "HBN Technology" at 73.408,78.716 h2
Mechanical 1:
  the board outline again, w0.254

## Text inside footprints (layer, text, board x,y; h text height)
J1: Top Overlay "7" at 87.376,106.836 h0.7 r90; Top Overlay "1" at 87.376,85.937 h0.7 r90; Mechanical 40 "2.540" at 84.709,86.716 h0.7 r90; Mechanical 40 "2.413" at 86.868,80.874 h0.7 r90; Mechanical 16 "7" at 87.376,106.836 h0.7 r90; Mechanical 16 "1" at 87.376,85.937 h0.7 r90